# Altium PCB Main.PcbDoc (part 2 of 2)
Units mm, origin at the board's own origin, x right, y up, seen from the top; angles counter-clockwise.
Board outline 184.78 x 184.78 mm, 2 copper layers (Top Layer, Bottom Layer); 86 components, 58 nets, 400 pads, 1067 vias.
Unrouted connection lines stored in the file: 51.
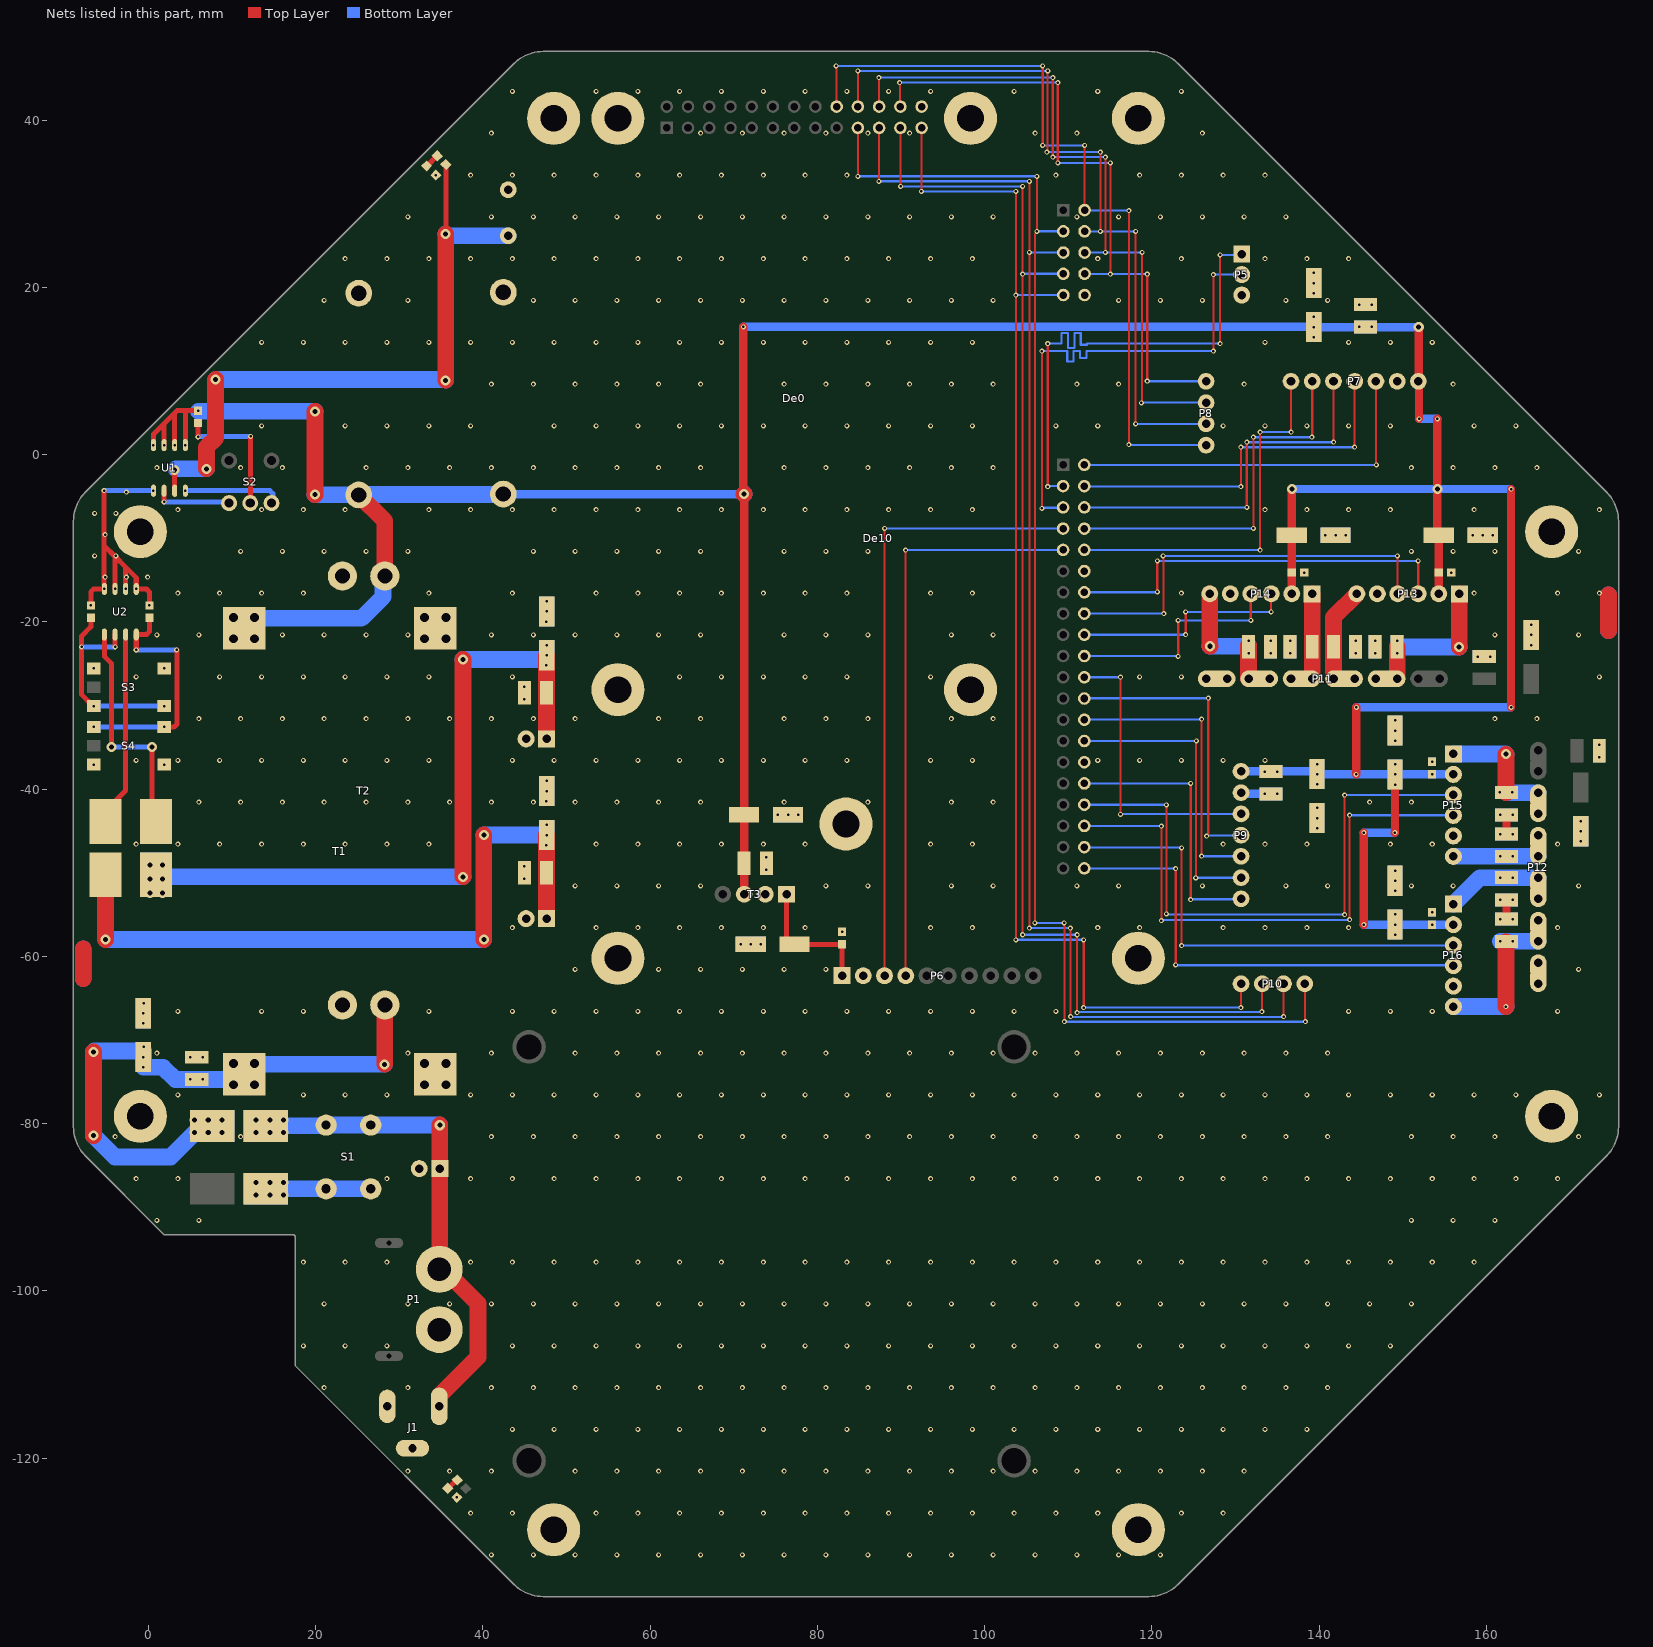
[diagram p2: the nets of this part, all layers, seen from the top]

## Via types
v1: diameter 0.6, hole 0.3, Top Layer to Bottom Layer, tented both sides, 717 vias
v2: diameter 0.6, hole 0.3, Top Layer to Bottom Layer, 287 vias
v3: diameter 1.2, hole 0.6, Top Layer to Bottom Layer, 54 vias
v4: diameter 1.83, hole 1.83, Top Layer to Bottom Layer, tented both sides, 4 vias
v5: diameter 6, hole 3, Top Layer to Bottom Layer, 4 vias
v6: diameter 1.27, hole 0.6, Top Layer to Bottom Layer, tented both sides, 1 vias

## Nets (pads, with @x,y where several pads share a name; then routed paths per layer and width w, separated by ;. In a path a pad name is that pad's centre, name@x,y a point inside that pad or via, vN(x,y) a via of type N, cw(c..) or ccw(c..) an arc to the next point about the centre after c; other vN are vias at no path point) (continued)
A_GND: C1.2 C2.2 C3.1 C4.1 C5.2 C6.2 C7.2 C8.2 C9.1 C10.1 C11.2 C12.1 C13.2 C14.2 C15.1 C16.1 C17.1 C18.1 C19.2 C20.2 C21.2 C22.2 C23.1 C24.1 C25.2 C26.1 C27.2 C28.1 C29.2 C30.2 C31.1 C32.1 C33.2 C34.1 C35.2 C36.1 D1.2 D2.2 De0.0 De0.26 De10.0 De10.10 De10.22 De10.40 J1.2 J1.3 MH1.1 MH2.1 MH3.1 MH4.1 MH5.1 MH6.1 MH7.1 MH8.1 MH9.1 P1.2 P2.2 P3.2 P4.2 P5.3 P6.2 P7.2 P9.2 P11.11 P11.12 P12.11 P12.12 P13.5 P14.5 P15.5 P16.5 pad.1@134.195,-23 pad.1@134.235,-40.575 pad.1@136.515,-23 pad.1@144.355,-23 pad.1@146.675,-23 pad.1@159.715,-24.16 pad.1@162.397,-43.083 pad.1@162.397,-45.403 pad.1@162.397,-53.243 pad.1@162.397,-55.563 pad.1@173.485,-35.425 pad.2@47.6,-18.75 pad.2@47.6,-40.25 pad.2@72.015,-58.575 pad.2@76.475,-43.05 pad.2@139.335,20.5 pad.2@139.735,-43.475 pad.2@141.965,-9.665 pad.2@145.535,17.925 pad.2@149.062,-33.003 pad.2@149.062,-50.968 pad.2@153.507,-36.753 pad.2@153.507,-54.718 pad.2@159.549,-9.665 pad.2@165.335,-21.575 pad.2@171.287,-45.048 pad.2@-0.603,-66.809 R4.1 S3.2 S4.1 T1.2 T1.4 T2.2 T2.4 T3.2 | length 24.8
  Top Layer w1: C36.1@162.397,-55.563 C35.2@162.397,-53.243 ; C34.1@162.397,-45.403 C33.2@162.397,-43.083
  Top Layer w2: -7.79,-62.7 -7.79,-59.1 ; 174.585,-21.05 174.585,-16.8
  Bottom Layer w1: P9.2@130.647,-40.433 130.789,-40.575 v2(133.485,-40.575) v2(134.985,-40.575) ; pad.2@139.335,20.525 pad.2@139.37,20.49
  Bottom Layer w2: -7.79,-62.7 -7.79,-59.1 ; 174.585,-21.05 174.585,-16.8
  other v1: 41.015,-131.575 46.015,-131.575 51.015,-131.575 56.015,-131.575 61.015,-131.575 66.015,-131.575 71.015,-131.575 76.015,-131.575 81.015,-131.575 86.015,-131.575 91.015,-131.575 96.015,-131.575 101.015,-131.575 106.015,-131.575 111.015,-131.575 116.015,-131.575 121.015,-131.575 38.515,-126.575 43.515,-126.575 53.515,-126.575 58.515,-126.575 63.515,-126.575 68.515,-126.575 73.515,-126.575 78.515,-126.575 83.515,-126.575 88.515,-126.575 93.515,-126.575 98.515,-126.575 103.515,-126.575 108.515,-126.575 113.515,-126.575 123.515,-126.575 128.515,-126.575 31.015,-121.575 36.015,-121.575 41.015,-121.575 51.015,-121.575 56.015,-121.575 61.015,-121.575 66.015,-121.575 71.015,-121.575 76.015,-121.575 81.015,-121.575 86.015,-121.575 91.015,-121.575 96.015,-121.575 101.015,-121.575 106.015,-121.575 111.015,-121.575 116.015,-121.575 121.015,-121.575 126.015,-121.575 131.015,-121.575 43.515,-116.575 48.515,-116.575 53.515,-116.575 58.515,-116.575 63.515,-116.575 68.515,-116.575 73.515,-116.575 78.515,-116.575 83.515,-116.575 88.515,-116.575 93.515,-116.575 98.515,-116.575 103.515,-116.575 108.515,-116.575 113.515,-116.575 118.515,-116.575 123.515,-116.575 128.515,-116.575 133.515,-116.575 138.515,-116.575 21.015,-111.575 31.015,-111.575 41.015,-111.575 46.015,-111.575 51.015,-111.575 56.015,-111.575 61.015,-111.575 66.015,-111.575 71.015,-111.575 76.015,-111.575 81.015,-111.575 86.015,-111.575 91.015,-111.575 96.015,-111.575 101.015,-111.575 106.015,-111.575 111.015,-111.575 116.015,-111.575 121.015,-111.575 126.015,-111.575 131.015,-111.575 136.015,-111.575 141.015,-111.575 18.515,-106.575 23.515,-106.575 28.515,-106.575 43.515,-106.575 48.515,-106.575 53.515,-106.575 58.515,-106.575 63.515,-106.575 68.515,-106.575 73.515,-106.575 78.515,-106.575 83.515,-106.575 88.515,-106.575 93.515,-106.575 98.515,-106.575 103.515,-106.575 108.515,-106.575 113.515,-106.575 118.515,-106.575 123.515,-106.575 128.515,-106.575 133.515,-106.575 138.515,-106.575 143.515,-106.575 148.515,-106.575 21.015,-101.575 31.015,-101.575 36.015,-101.575 41.015,-101.575 46.015,-101.575 51.015,-101.575 56.015,-101.575 61.015,-101.575 66.015,-101.575 71.015,-101.575 76.015,-101.575 81.015,-101.575 86.015,-101.575 91.015,-101.575 96.015,-101.575 101.015,-101.575 106.015,-101.575 111.015,-101.575 116.015,-101.575 121.015,-101.575 126.015,-101.575 131.015,-101.575 136.015,-101.575 141.015,-101.575 146.015,-101.575 151.015,-101.575 18.515,-96.575 23.515,-96.575 28.515,-96.575 38.515,-96.575 43.515,-96.575 48.515,-96.575 53.515,-96.575 58.515,-96.575 63.515,-96.575 68.515,-96.575 73.515,-96.575 78.515,-96.575 83.515,-96.575 88.515,-96.575 93.515,-96.575 98.515,-96.575 103.515,-96.575 108.515,-96.575 113.515,-96.575 118.515,-96.575 123.515,-96.575 128.515,-96.575 133.515,-96.575 138.515,-96.575 143.515,-96.575 148.515,-96.575 153.515,-96.575 158.515,-96.575 1.015,-91.575 6.015,-91.575 151.015,-91.575 156.015,-91.575 161.015,-91.575 -1.485,-86.575 3.515,-86.575 28.515,-86.575 38.515,-86.575 43.515,-86.575 48.515,-86.575 53.515,-86.575 58.515,-86.575 63.515,-86.575 68.515,-86.575 73.515,-86.575 78.515,-86.575 83.515,-86.575 88.515,-86.575 93.515,-86.575 98.515,-86.575 103.515,-86.575 108.515,-86.575 113.515,-86.575 118.515,-86.575 123.515,-86.575 128.515,-86.575 133.515,-86.575 138.515,-86.575 143.515,-86.575 148.515,-86.575 153.515,-86.575 158.515,-86.575 163.515,-86.575 168.515,-86.575 -3.985,-81.575 11.015,-81.575 41.015,-81.575 46.015,-81.575 51.015,-81.575 56.015,-81.575 61.015,-81.575 66.015,-81.575 71.015,-81.575 76.015,-81.575 81.015,-81.575 86.015,-81.575 91.015,-81.575 96.015,-81.575 101.015,-81.575 106.015,-81.575 111.015,-81.575 116.015,-81.575 121.015,-81.575 126.015,-81.575 131.015,-81.575 136.015,-81.575 141.015,-81.575 151.015,-81.575 156.015,-81.575 161.015,-81.575 171.015,-81.575 3.515,-76.575 18.515,-76.575 23.515,-76.575 28.515,-76.575 38.515,-76.575 43.515,-76.575 48.515,-76.575 53.515,-76.575 58.515,-76.575 63.515,-76.575 68.515,-76.575 73.515,-76.575 78.515,-76.575 83.515,-76.575 88.515,-76.575 93.515,-76.575 98.515,-76.575 103.515,-76.575 108.515,-76.575 113.515,-76.575 118.515,-76.575 123.515,-76.575 128.515,-76.575 133.515,-76.575 138.515,-76.575 143.515,-76.575 148.515,-76.575 153.515,-76.575 158.515,-76.575 163.515,-76.575 173.515,-76.575 1.015,-71.575 31.015,-71.575 41.015,-71.575 51.015,-71.575 56.015,-71.575 61.015,-71.575 66.015,-71.575 71.015,-71.575 76.015,-71.575 81.015,-71.575 86.015,-71.575 91.015,-71.575 96.015,-71.575 101.015,-71.575 106.015,-71.575 111.015,-71.575 116.015,-71.575 121.015,-71.575 126.015,-71.575 131.015,-71.575 136.015,-71.575 141.015,-71.575 3.515,-66.575 13.515,-66.575 18.515,-66.575 33.515,-66.575 43.515,-66.575 48.515,-66.575 53.515,-66.575 58.515,-66.575 63.515,-66.575 68.515,-66.575 73.515,-66.575 78.515,-66.575 83.515,-66.575 88.515,-66.575 93.515,-66.575 98.515,-66.575 103.515,-66.575 108.515,-66.575 143.515,-66.575 148.515,-66.575 153.515,-66.575 168.515,-66.575 51.015,-61.575 61.015,-61.575 66.015,-61.575 71.015,-61.575 76.015,-61.575 81.015,-61.575 171.015,-61.575 43.515,-56.575 53.515,-56.575 58.515,-56.575 63.515,-56.575 68.515,-56.575 73.515,-56.575 78.515,-56.575 93.515,-56.575 98.515,-56.575 113.515,-56.575 118.515,-56.575 128.515,-56.575 133.515,-56.575 138.515,-56.575 143.515,-56.575 168.515,-56.575 51.015,-51.575 56.015,-51.575 61.015,-51.575 66.015,-51.575 81.015,-51.575 86.015,-51.575 96.015,-51.575 101.015,-51.575 111.015,-51.575 116.015,-51.575 126.015,-51.575 136.015,-51.575 141.015,-51.575 151.015,-51.575 156.015,-51.575 171.015,-51.575 -1.485,-46.575 3.515,-46.575 8.515,-46.575 13.515,-46.575 18.515,-46.575 23.515,-46.575 28.515,-46.575 33.515,-46.575 53.515,-46.575 58.515,-46.575 63.515,-46.575 68.515,-46.575 73.515,-46.575 78.515,-46.575 93.515,-46.575 98.515,-46.575 128.515,-46.575 133.515,-46.575 138.515,-46.575 148.515,-46.575 153.515,-46.575 168.515,-46.575 6.015,-41.575 11.015,-41.575 16.015,-41.575 21.015,-41.575 26.015,-41.575 31.015,-41.575 36.015,-41.575 41.015,-41.575 46.015,-41.575 51.015,-41.575 56.015,-41.575 61.015,-41.575 66.015,-41.575 76.015,-41.575 86.015,-41.575 96.015,-41.575 101.015,-41.575 146.015,-41.575 151.015,-41.575 -1.485,-36.575 3.515,-36.575 8.515,-36.575 13.515,-36.575 18.515,-36.575 23.515,-36.575 28.515,-36.575 33.515,-36.575 43.515,-36.575 48.515,-36.575 53.515,-36.575 58.515,-36.575 63.515,-36.575 68.515,-36.575 73.515,-36.575 78.515,-36.575 83.515,-36.575 93.515,-36.575 98.515,-36.575 113.515,-36.575 118.515,-36.575 123.515,-36.575 128.515,-36.575 133.515,-36.575 6.015,-31.575 11.015,-31.575 16.015,-31.575 21.015,-31.575 26.015,-31.575 31.015,-31.575 36.015,-31.575 41.015,-31.575 46.015,-31.575 51.015,-31.575 61.015,-31.575 66.015,-31.575 76.015,-31.575 81.015,-31.575 86.015,-31.575 96.015,-31.575 101.015,-31.575 161.015,-31.575 166.015,-31.575 -1.485,-26.575 8.515,-26.575 13.515,-26.575 18.515,-26.575 23.515,-26.575 28.515,-26.575 33.515,-26.575 43.515,-26.575 63.515,-26.575 68.515,-26.575 73.515,-26.575 78.515,-26.575 83.515,-26.575 93.515,-26.575 118.515,-26.575 123.515,-26.575 173.515,-26.575 1.015,-21.575 6.015,-21.575 16.015,-21.575 21.015,-21.575 26.015,-21.575 31.015,-21.575 41.015,-21.575 46.015,-21.575 51.015,-21.575 56.015,-21.575 61.015,-21.575 66.015,-21.575 76.015,-21.575 81.015,-21.575 86.015,-21.575 96.015,-21.575 101.015,-21.575 161.015,-21.575 171.015,-21.575 3.515,-16.575 8.515,-16.575 13.515,-16.575 18.515,-16.575 33.515,-16.575 43.515,-16.575 53.515,-16.575 58.515,-16.575 63.515,-16.575 68.515,-16.575 73.515,-16.575 78.515,-16.575 83.515,-16.575 93.515,-16.575 98.515,-16.575 123.515,-16.575 158.515,-16.575 168.515,-16.575 173.515,-16.575 11.015,-11.575 16.015,-11.575 21.015,-11.575 26.015,-11.575 31.015,-11.575 46.015,-11.575 51.015,-11.575 56.015,-11.575 61.015,-11.575 66.015,-11.575 76.015,-11.575 81.015,-11.575 86.015,-11.575 151.015,-11.575 156.015,-11.575 161.015,-11.575 171.015,-11.575 3.515,-6.575 13.515,-6.575 18.515,-6.575 23.515,-6.575 33.515,-6.575 38.515,-6.575 43.515,-6.575 48.515,-6.575 53.515,-6.575 58.515,-6.575 63.515,-6.575 68.515,-6.575 73.515,-6.575 78.515,-6.575 83.515,-6.575 88.515,-6.575 93.515,-6.575 98.515,-6.575 133.515,-6.575 138.515,-6.575 143.515,-6.575 148.515,-6.575 158.515,-6.575 173.515,-6.575 1.015,-1.575 11.015,-1.575 16.015,-1.575 26.015,-1.575 31.015,-1.575 36.015,-1.575 41.015,-1.575 46.015,-1.575 51.015,-1.575 56.015,-1.575 61.015,-1.575 66.015,-1.575 76.015,-1.575 81.015,-1.575 86.015,-1.575 91.015,-1.575 96.015,-1.575 101.015,-1.575 151.015,-1.575 156.015,-1.575 161.015,-1.575 166.015,-1.575 13.515,3.425 23.515,3.425 28.515,3.425 33.515,3.425 38.515,3.425 48.515,3.425 53.515,3.425 58.515,3.425 63.515,3.425 68.515,3.425 73.515,3.425 78.515,3.425 83.515,3.425 88.515,3.425 93.515,3.425 98.515,3.425 108.515,3.425 113.515,3.425 128.515,3.425 133.515,3.425 138.515,3.425 143.515,3.425 148.515,3.425 158.515,3.425 163.515,3.425 41.015,8.425 46.015,8.425 51.015,8.425 56.015,8.425 61.015,8.425 66.015,8.425 76.015,8.425 81.015,8.425 86.015,8.425 91.015,8.425 96.015,8.425 101.015,8.425 111.015,8.425 116.015,8.425 131.015,8.425 156.015,8.425 13.515,13.425 18.515,13.425 23.515,13.425 28.515,13.425 33.515,13.425 38.515,13.425 43.515,13.425 48.515,13.425 53.515,13.425 58.515,13.425 63.515,13.425 68.515,13.425 73.515,13.425 78.515,13.425 83.515,13.425 88.515,13.425 93.515,13.425 98.515,13.425 133.515,13.425 143.515,13.425 148.515,13.425 153.515,13.425 21.015,18.425 31.015,18.425 46.015,18.425 51.015,18.425 56.015,18.425 61.015,18.425 66.015,18.425 71.015,18.425 76.015,18.425 81.015,18.425 86.015,18.425 91.015,18.425 96.015,18.425 101.015,18.425 116.015,18.425 121.015,18.425 126.015,18.425 136.015,18.425 141.015,18.425 23.515,23.425 28.515,23.425 33.515,23.425 38.515,23.425 43.515,23.425 48.515,23.425 53.515,23.425 58.515,23.425 63.515,23.425 68.515,23.425 73.515,23.425 78.515,23.425 83.515,23.425 88.515,23.425 93.515,23.425 98.515,23.425 113.515,23.425 123.515,23.425 133.515,23.425 138.515,23.425 143.515,23.425 31.015,28.425 41.015,28.425 46.015,28.425 51.015,28.425 56.015,28.425 61.015,28.425 66.015,28.425 71.015,28.425 76.015,28.425 81.015,28.425 86.015,28.425 91.015,28.425 96.015,28.425 101.015,28.425 111.015,28.425 116.015,28.425 121.015,28.425 126.015,28.425 131.015,28.425 136.015,28.425 38.515,33.425 43.515,33.425 48.515,33.425 53.515,33.425 58.515,33.425 63.515,33.425 68.515,33.425 73.515,33.425 78.515,33.425 83.515,33.425 108.515,33.425 118.515,33.425 123.515,33.425 128.515,33.425 133.515,33.425 41.015,38.425 66.015,38.425 71.015,38.425 76.015,38.425 81.015,38.425 86.015,38.425 91.015,38.425 106.015,38.425 111.015,38.425 126.015,38.425 43.515,43.425 53.515,43.425 58.515,43.425 63.515,43.425 68.515,43.425 73.515,43.425 78.515,43.425 83.515,43.425 88.515,43.425 93.515,43.425 103.515,43.425 113.515,43.425 123.515,43.425
  other v2: 36.88,-124.711 5.015,-72.075 6.515,-72.075 -0.603,-68.025 -0.603,-66.809 -0.587,-65.594 70.799,-58.559 72.015,-58.575 73.23,-58.575 82.935,-57.075 161.647,-55.563 163.147,-55.563 153.507,-54.718 161.647,-53.243 163.147,-53.243 149.062,-52.183 149.062,-50.968 44.95,-50.75 149.078,-49.752 73.875,-49.642 44.95,-49.25 73.875,-48.142 171.287,-46.263 161.647,-45.403 163.147,-45.403 171.287,-45.048 139.735,-44.69 171.303,-43.832 139.735,-43.475 77.69,-43.066 161.647,-43.083 163.147,-43.083 75.26,-43.05 76.475,-43.05 139.751,-42.26 47.584,-41.466 47.6,-40.25 47.6,-39.035 -6.535,-37.075 1.865,-37.075 153.507,-36.753 173.485,-36.175 173.485,-34.675 149.062,-34.218 149.062,-33.003 149.078,-31.787 44.95,-29.25 44.95,-27.75 -6.535,-25.575 1.865,-25.575 158.965,-24.16 160.465,-24.16 134.195,-23.75 136.515,-23.75 144.355,-23.75 146.675,-23.75 165.335,-22.79 134.195,-22.25 136.515,-22.25 144.355,-22.25 146.675,-22.25 165.335,-21.575 165.351,-20.359 47.584,-19.965 47.6,-18.75 47.6,-17.534 138.215,-14.11 155.799,-14.11 141.965,-9.665 143.18,-9.665 159.549,-9.665 160.765,-9.665 140.749,-9.649 158.334,-9.649 144.785,17.925 146.285,17.925 139.319,19.285 139.335,20.5 139.335,21.715 34.356,33.42
B_12V: C1.1 C3.2 F1.2 pad.1@7.639,-80.314 pad.2@-0.603,-72.059 T1.1 T2.1 | length 69.2
  Top Layer w2: v3(-6.572,-81.457) v3(-6.572,-71.424) ; v3(28.235,-72.925) 28.235,-65.855 T2.1@28.265,-65.825
  Bottom Layer w2: v3(-6.572,-81.457) -4.032,-83.997 2.648,-83.997 6.331,-80.314 pad.1@7.639,-80.314 ; v3(-6.572,-71.424) -6.482,-71.334 -0.603,-71.334 v2(-0.603,-72.059) v2(-0.603,-73.275) 1.755,-73.275 3.206,-74.725 v2(6.515,-74.725) 9.515,-74.725 9.685,-74.895 9.885,-74.895 10.155,-75.165 T1.1@10.155,-75.365 ; T1.1@12.695,-72.825 12.865,-72.825 12.965,-72.925 v3(28.235,-72.925)
  other v2: 5.015,-74.725 -0.587,-70.844
  other v3: 5.493,-81.076 7.144,-81.076 8.795,-81.076 5.493,-79.552 7.144,-79.552 8.795,-79.552
D_3P3: C11.1 C12.2 P6.1 T3.3 | length 16
  Top Layer w0.6: T3.3@76.305,-52.575 76.305,-57.95 76.93,-58.575 C11.1@77.265,-58.575 C12.2@82.935,-58.575 P6.1@82.935,-62.325
D_5V: C2.1 C4.2 C5.1 C6.1 C13.1 C14.1 C15.2 C16.2 C21.1 C22.1 C23.2 C24.2 C29.1 C30.1 C31.2 C32.2 P7.1 P9.1 P13.2 P14.2 P15.2 P16.2 pad.1@134.235,-37.925 pad.1@139.735,-38.225 pad.1@149.062,-56.218 pad.2@139.335,15.25 pad.2@145.535,15.275 pad.2@149.062,-38.253 R2.2 T1.3 T2.3 T3.1 U1.5 U1.6 U1.7 U1.8 | length 456.5
  Top Layer w0.6: v2(0.595,1.125) 0.595,2.435 1.865,3.705 ; v2(1.865,1.125) 1.865,3.705 ; v2(3.135,1.125) 3.135,4.975 ; v2(4.405,1.125) 4.405,5.075 ; v2(5.935,5.225) 5.885,5.275 4.405,5.275 3.435,5.275 3.135,4.975 ; 1.865,3.705 3.135,4.975
  Top Layer w1: v3@71.135,-4.625 v2(71.135,15.275) ; T3.1@71.225,-52.575 C4.2@71.225,-48.892 C2.1@71.225,-43.05 v3@71.225,-4.735 ; P14.2@136.715,-16.65 C24.2@136.715,-14.11 C22.1@136.715,-9.665 136.735,-9.645 v3(136.735,-4.125) ; v2(144.419,-38.253) 144.435,-38.237 v2(144.435,-30.225) ; v2(145.335,-56.225) v2(145.335,-45.225) ; v2(149.035,-45.225) 149.062,-45.198 v2(149.062,-38.253) v2(149.062,-39.468) ; P7.1@151.865,8.75 151.9,8.785 v3(151.9,15.24) ; v2(151.935,4.275) P7.1@151.935,8.68 ; v2(154.135,4.275) 154.135,-9.501 C21.1@154.299,-9.665 C23.2@154.299,-14.11 P13.2@154.299,-16.65 ; v2(162.935,-30.225) v2(162.935,-4.125)
  Top Layer w2: v3(19.9,-4.8) v3@19.9,5.14 ; C5.1@25.135,-4.827 25.137,-4.827 28.265,-7.955 T2.3@28.265,-14.525 ; v3@71.225,-4.735 v3(71.235,-4.725)
  Bottom Layer w1: C6.1@42.69,-4.728 v3@71.232,-4.728 ; v2(71.135,15.275) 139.335,15.275 139.37,15.24 v3(151.9,15.24) ; P9.1@130.647,-37.893 139.403,-37.893 v2(139.735,-38.225) 139.749,-38.225 139.777,-38.253 v2(144.419,-38.253) v2(149.062,-38.253) ; v3(136.735,-4.125) v3(154.135,-4.125) v2(162.935,-4.125) ; v2(144.435,-30.225) v2(162.935,-30.225) ; v2(145.335,-56.225) pad.1@149.055,-56.225 ; v2(145.335,-45.225) v2(149.035,-45.225) ; pad.2@149.055,-38.26 v2(149.062,-38.253) ; v2(149.062,-56.218) v2(153.507,-56.218) P16.2@156.047,-56.218 ; P7.1@151.835,8.78 P7.1@151.865,8.75 ; v2(151.935,4.275) v2(154.135,4.275) ; P15.2@156.047,-38.253 v2(153.507,-38.253) v2(149.062,-38.253)
  Bottom Layer w2: v2@5.985,5.175 v3(19.935,5.175) ; T1.3@12.695,-19.485 12.795,-19.585 25.455,-19.585 28.031,-17.009 28.031,-14.759 T2.3@28.265,-14.525 ; v3(19.9,-4.8) 19.905,-4.805 24.581,-4.805 24.603,-4.827 C5.1@25.135,-4.827 25.196,-4.767 42.396,-4.767 C6.1@42.435,-4.727 ; v3@71.232,-4.728 v3(71.235,-4.725)
  other v2: 149.062,-57.433 149.078,-55.002 139.735,-39.441 133.485,-37.925 134.985,-37.925 149.078,-37.037 139.751,-37.01 139.319,14.034 139.335,15.25 144.785,15.275 146.285,15.275 139.335,16.465
Drive_EN1: De10.20 P7.7 | length 44.9
  Top Layer w0.254: v2(132.935,-11.425) v2(132.935,2.675) ; P7.7@136.625,8.75 136.63,8.745 136.63,2.68 v2(136.635,2.675)
  Bottom Layer w0.254: De10.20@111.904,-11.393 132.703,-11.393 132.735,-11.425 v2(132.935,-11.425) ; v2(132.935,2.675) v2(136.635,2.675)
Drive_EN2: De10.42 P9.7 | length 32.7
  Top Layer w0.254: v2(124.635,-53.225) v2(124.635,-39.325)
  Bottom Layer w0.254: De10.42@111.904,-39.333 124.627,-39.333 v2(124.635,-39.325) ; v2(124.635,-53.225) 124.681,-53.179 130.601,-53.179 P9.7@130.647,-53.133
FPGA_Power: F4.1 U2.1 | length 27.7
  Top Layer w0.6: U2.1@-5.275,-21.525 -5.275,-24.125 -4.4,-25 v3(-4.4,-35) ; v3(0.4,-35) 0.4,-43.372 F4.1@0.915,-43.887
  Bottom Layer w0.6: v3(-4.4,-35) v3(0.4,-35)
IMU_SCL: De10.17 P6.3 | length 74.8
  Top Layer w0.254: P6.3@88.015,-62.325 88.025,-62.315 88.025,-8.835 v2(88.035,-8.825)
  Bottom Layer w0.254: v2(88.035,-8.825) 88.049,-8.839 109.35,-8.839 De10.17@109.364,-8.853
IMU_SDA: De10.19 P6.4 | length 69.8
  Top Layer w0.254: v2(90.535,-11.425) 90.545,-11.435 90.545,-62.315 P6.4@90.555,-62.325
  Bottom Layer w0.254: v2(90.535,-11.425) 90.551,-11.409 109.348,-11.409 De10.19@109.364,-11.393
MA1: C25.1 P11.3 P11.4 P13.1 pad.1@149.325,-23 | length 17.6
  Top Layer w2: P11.3@149.325,-26.81 v2(149.325,-23.75) C25.1@149.325,-23 ; v3(156.735,-23.025) 156.749,-23.011 P13.1@156.749,-16.65
  Bottom Layer w2: pad.1@149.325,-23 149.35,-23.025 v3(156.735,-23.025)
  other v2: 149.325,-22.25
MA2: C26.2 P11.5 P11.6 P13.6 | length 11.3
  Top Layer w2: P11.6@141.705,-26.81 C26.2@141.705,-23 141.705,-19.444 P13.6@144.499,-16.65
MA_DIR: De10.12 P7.3 | length 44.9
  Top Layer w0.254: P7.3@146.785,8.75 146.806,8.729 146.806,-1.212 v2(146.827,-1.233)
  Bottom Layer w0.254: De10.12@111.904,-1.233 v2(146.827,-1.233)
MA_I: De0.20 De10.4 P8.2 | length 90.2
  Top Layer w0.254: De0.20@84.836,41.604 v2(84.835,45.875) ; v2(107.435,36.175) 107.489,36.229 107.489,45.829 v2(107.535,45.875) ; v2(113.835,26.675) v2(113.835,36.175) ; v2(118.035,3.675) v2(118.035,26.675)
  Bottom Layer w0.254: v2(84.835,45.875) v2(107.535,45.875) ; v2(107.435,36.175) v2(113.835,36.175) ; De10.4@111.934,26.697 111.945,26.686 113.824,26.686 v2(113.835,26.675) v2(118.035,26.675) ; v2(118.035,3.675) 118.038,3.672 126.462,3.672 P8.2@126.465,3.67
MA_phase1: De10.24 P13.3 | length 47.6
  Top Layer w0.254: v2(120.635,-16.425) v2(120.635,-12.725) ; v2(151.835,-12.725) 151.842,-12.732 151.842,-16.643 P13.3@151.849,-16.65
  Bottom Layer w0.254: De10.24@111.904,-16.473 120.587,-16.473 v2(120.635,-16.425) ; v2(120.635,-12.725) v2(151.835,-12.725)
MA_phase2: De10.26 P13.4 | length 49
  Top Layer w0.254: v2(121.335,-12.125) 121.385,-12.175 121.385,-18.975 v2(121.435,-19.025) ; v2(149.335,-12.125) 149.367,-12.157 149.367,-16.618 P13.4@149.399,-16.65
  Bottom Layer w0.254: De10.26@111.904,-19.013 121.423,-19.013 v2(121.435,-19.025) ; v2(121.335,-12.125) v2(149.335,-12.125)
MA_PWM: De10.14 P7.4 | length 44.9
  Top Layer w0.254: v2(130.635,-3.825) v2(130.635,0.875) ; v2(144.235,0.875) 144.24,0.88 144.24,8.745 P7.4@144.245,8.75
  Bottom Layer w0.254: De10.14@111.904,-3.773 111.93,-3.799 130.609,-3.799 v2(130.635,-3.825) ; v2(130.635,0.875) v2(144.235,0.875)
MA_V: De0.18 De10.2 P8.1 | length 94.4
  Top Layer w0.254: v2(82.235,46.475) 82.265,46.445 82.265,41.635 De0.18@82.296,41.604 ; v2(106.935,36.975) v2(106.935,46.475) ; De10.2@111.934,29.238 v2(111.935,36.975) ; v2(117.235,1.175) v2(117.235,29.175)
  Bottom Layer w0.254: v2(82.235,46.475) v2(106.935,46.475) ; v2(106.935,36.975) v2(111.935,36.975) ; De10.2@111.934,29.237 111.965,29.206 117.204,29.206 v2(117.235,29.175) ; v2(117.235,1.175) 117.28,1.13 P8.1@126.465,1.13
MB1: C27.1 P11.7 P11.8 P14.1 | length 10.2
  Top Layer w2: P11.7@139.165,-26.81 P14.1@139.165,-16.65
MB2: C28.2 P11.9 P11.10 P14.6 pad.1@131.545,-23 | length 14.9
  Top Layer w2: P14.6@126.915,-16.65 126.915,-22.905 v3(126.935,-22.925) ; P11.10@131.545,-26.81 v2(131.545,-23.75) C28.2@131.545,-23 C28.2@131.545,-22.825
  Bottom Layer w2: v3(126.935,-22.925) 126.947,-22.913 pad.1@131.545,-22.913
  other v2: 131.545,-22.25
MB_DIR: De10.16 P7.5 | length 44.9
  Top Layer w0.254: v2(131.335,-6.325) v2(131.335,1.475) ; P7.5@141.705,8.75 141.72,8.735 141.72,1.49 v2(141.735,1.475)
  Bottom Layer w0.254: De10.16@111.904,-6.313 131.323,-6.313 v2(131.335,-6.325) ; v2(131.335,1.475) v2(141.735,1.475)
MB_I: De0.24 De10.8 P8.4 | length 78.4
  Top Layer w0.254: v2(89.835,44.475) 89.875,44.435 89.875,41.645 De0.24@89.916,41.604 ; v2(108.735,34.875) v2(108.735,44.475) ; v2(115.035,21.575) v2(115.035,34.875) ; v2(119.435,8.775) v2(119.435,21.575)
  Bottom Layer w0.254: v2(89.835,44.475) v2(108.735,44.475) ; v2(108.735,34.875) v2(115.035,34.875) ; De10.8@111.934,21.617 111.955,21.596 115.014,21.596 v2(115.035,21.575) v2(119.435,21.575) ; v2(119.435,8.775) 119.448,8.762 126.452,8.762 P8.4@126.465,8.75
MB_phase1: De10.28 P14.3 | length 27.2
  Top Layer w0.254: v2(124.035,-21.525) v2(124.035,-18.825) ; v2(134.235,-18.825) 134.25,-18.81 134.25,-16.665 P14.3@134.265,-16.65
  Bottom Layer w0.254: De10.28@111.904,-21.553 124.007,-21.553 v2(124.035,-21.525) ; v2(124.035,-18.825) v2(134.235,-18.825)
MB_phase2: De10.30 P14.4 | length 27.4
  Top Layer w0.254: v2(123.135,-24.125) v2(123.135,-19.825) ; P14.4@131.815,-16.65 131.815,-19.805 v2(131.835,-19.825)
  Bottom Layer w0.254: De10.30@111.904,-24.093 111.92,-24.109 123.119,-24.109 v2(123.135,-24.125) ; v2(123.135,-19.825) v2(131.835,-19.825)
MB_PWM: De10.18 P7.6 | length 44.8
  Top Layer w0.254: v2(132.135,-8.825) v2(132.135,2.075) ; v2(139.135,2.075) 139.165,2.105 P7.6@139.165,8.75
  Bottom Layer w0.254: De10.18@111.904,-8.853 111.918,-8.839 132.121,-8.839 v2(132.135,-8.825) ; v2(132.135,2.075) v2(139.135,2.075)
MB_V: De0.22 De10.6 P8.3 | length 84.2
  Top Layer w0.254: v2(87.335,45.075) 87.355,45.055 87.355,41.625 De0.22@87.376,41.604 ; v2(108.135,35.575) v2(108.135,45.075) ; v2(114.435,24.175) v2(114.435,35.575) ; v2(118.735,6.175) 118.785,6.225 118.785,24.125 v2(118.835,24.175)
  Bottom Layer w0.254: v2(87.335,45.075) v2(108.135,45.075) ; v2(108.135,35.575) v2(114.435,35.575) ; De10.6@111.934,24.157 111.943,24.166 114.426,24.166 v2(114.435,24.175) v2(118.835,24.175) ; v2(118.735,6.175) 118.77,6.21 P8.3@126.465,6.21
MC1: C33.1 P12.3 P12.4 P15.1 pad.1@162.397,-40.433 | length 14.7
  Top Layer w2: v3(162.335,-35.825) 162.335,-40.371 C33.1@162.397,-40.433
  Bottom Layer w2: P15.1@156.047,-35.803 162.313,-35.803 v3(162.335,-35.825) ; pad.1@162.397,-40.433 P12.3@166.207,-40.433
  other v2: 161.585,-40.371 163.085,-40.371
MC2: C34.2 P12.5 P12.6 P15.6 pad.1@162.397,-48.053 | length 10.2
  Bottom Layer w2: P15.6@156.047,-48.053 P12.6@166.207,-48.053
  other v2: 161.647,-48.053 163.147,-48.053
MC_DIR: De10.32 P9.3 | length 35.2
  Top Layer w0.254: v2(116.235,-43.025) v2(116.235,-26.625)
  Bottom Layer w0.254: De10.32@111.904,-26.633 116.227,-26.633 v2(116.235,-26.625) ; v2(116.235,-43.025) 116.261,-42.999 130.621,-42.999 P9.3@130.647,-42.973
MC_I: De0.21 De10.5 P10.2 | length 162.7
  Top Layer w0.254: v2(87.335,32.675) 87.355,32.695 87.355,39.044 De0.21@87.376,39.064 ; v2(105.335,-56.625) 105.335,-55.825 v2(105.335,24.175) v2(105.335,32.675) ; v2(110.235,-56.625) 110.274,-56.664 v2(110.274,-67.206) ; P10.2@135.727,-63.293 135.731,-63.297 135.731,-67.221 v2(135.735,-67.225)
  Bottom Layer w0.254: v2(87.335,32.675) v2(105.335,32.675) ; v2(105.335,-56.625) v2(110.235,-56.625) ; v2(105.335,24.175) 105.344,24.166 109.385,24.166 De10.5@109.394,24.157 ; v2(110.274,-67.206) 110.368,-67.206 110.441,-67.279 135.681,-67.279 v2(135.735,-67.225)
MC_phase1: De10.44 P15.3 | length 71.5
  Top Layer w0.254: v2(121.709,-41.899) 121.735,-41.925 v2(121.735,-54.925) ; v2(143.023,-55.006) 143.035,-54.995 v2(143.035,-40.725)
  Bottom Layer w0.254: De10.44@111.904,-41.873 121.683,-41.873 v2(121.709,-41.899) ; v2(121.735,-54.925) 121.816,-55.006 v2(143.023,-55.006) ; v2(143.035,-40.725) 143.057,-40.703 P15.3@156.047,-40.703
MC_phase2: De10.46 P15.4 | length 68
  Top Layer w0.254: v2(121.135,-55.725) v2(121.135,-44.425) ; v2(143.635,-55.625) v2(143.635,-43.125)
  Bottom Layer w0.254: De10.46@111.904,-44.413 121.123,-44.413 v2(121.135,-44.425) ; v2(121.135,-55.725) 121.185,-55.675 143.585,-55.675 v2(143.635,-55.625) ; v2(143.635,-43.125) 143.649,-43.139 156.033,-43.139 P15.4@156.047,-43.153
MC_PWM: De10.34 P9.4 | length 35.6
  Top Layer w0.254: v2(126.535,-45.625) 126.535,-45.531 126.735,-45.331 v2(126.735,-29.125)
  Bottom Layer w0.254: De10.34@111.904,-29.173 111.928,-29.149 126.711,-29.149 v2(126.735,-29.125) ; v2(126.535,-45.625) 126.591,-45.569 130.591,-45.569 P9.4@130.647,-45.513
MC_V: De0.19 De10.3 P10.1 | length 168.4
  Top Layer w0.254: v2(84.835,33.275) De0.19@84.836,39.064 ; v2(106,-56) 106,26.346 106.235,26.581 v2(106.235,33.275) ; v2(109.5,-56) 109.518,-56.018 109.518,-67.807 v2(109.535,-67.825) ; P10.1@138.267,-63.293 138.301,-63.327 138.301,-67.791 v2(138.335,-67.825)
  Bottom Layer w0.254: v2(84.835,33.275) v2(106.235,33.275) ; v2(106,-56) v2(109.5,-56) ; v2(106.235,26.675) 106.257,26.697 De10.3@109.394,26.697 ; v2(109.535,-67.825) v2(138.335,-67.825)
MD1: C35.1 P12.7 P12.8 P16.1 pad.1@162.397,-50.593 | length 11.5
  Bottom Layer w2: P16.1@156.047,-53.768 159.222,-50.593 P12.7@166.207,-50.593
  other v2: 161.647,-50.593 163.147,-50.593
MD2: C36.2 P12.9 P12.10 P16.6 pad.1@162.397,-58.213 | length 18.6
  Top Layer w2: v2(162.328,-66.018) C36.2@162.328,-58.282
  Bottom Layer w2: P16.6@156.047,-66.018 v2(162.328,-66.018) ; v2(161.647,-58.213) v2(163.147,-58.213) P12.10@166.207,-58.213
MD_DIR: De10.36 P9.5 | length 35.2
  Top Layer w0.254: v2(125.935,-48.025) v2(125.935,-31.625)
  Bottom Layer w0.254: De10.36@111.904,-31.713 111.948,-31.669 125.891,-31.669 v2(125.935,-31.625) ; v2(125.935,-48.025) 125.949,-48.039 130.633,-48.039 P9.5@130.647,-48.053
MD_I: De0.25 De10.9 P10.4 | length 151.9
  Top Layer w0.254: v2(92.435,31.475) 92.456,31.496 De0.25@92.456,39.064 ; v2(103.735,-58.025) 103.735,-55.825 v2(103.735,19.075) v2(103.735,31.475) ; v2(111.835,-66.125) v2(111.835,-58.025) ; v2(130.635,-66.125) 130.647,-66.113 P10.4@130.647,-63.293
  Bottom Layer w0.254: v2(92.435,31.475) v2(103.735,31.475) ; v2(103.735,-58.025) v2(111.835,-58.025) ; v2(103.735,19.075) v2(103.735,19.075) 109.393,19.076 De10.9@109.394,19.077 ; v2(111.835,-66.125) v2(130.635,-66.125)
MD_phase1: De10.48 P16.3 | length 55.9
  Top Layer w0.254: v2(123.535,-58.725) v2(123.535,-47.025)
  Bottom Layer w0.254: De10.48@111.904,-46.953 111.94,-46.989 123.499,-46.989 v2(123.535,-47.025) ; v2(123.535,-58.725) 123.564,-58.696 156.019,-58.696 P16.3@156.047,-58.668
MD_phase2: De10.50 P16.4 | length 55.7
  Top Layer w0.254: v2(122.835,-61.025) v2(122.835,-49.525)
  Bottom Layer w0.254: De10.50@111.904,-49.493 111.92,-49.509 122.819,-49.509 v2(122.835,-49.525) ; v2(122.835,-61.025) 122.881,-61.071 156.001,-61.071 P16.4@156.047,-61.118
MD_PWM: De10.38 P9.6 | length 35.2
  Top Layer w0.254: v2(125.235,-50.625) 125.281,-50.579 125.281,-47.796 125.281,-34.279 v2(125.307,-34.253)
  Bottom Layer w0.254: De10.38@111.904,-34.253 v2(125.307,-34.253) ; v2(125.235,-50.625) 125.251,-50.609 130.631,-50.609 P9.6@130.647,-50.593
MD_V: De0.23 De10.7 P10.3 | length 157.3
  Top Layer w0.254: De0.23@89.916,39.064 89.925,39.055 89.925,32.085 v2(89.935,32.075) ; v2(104.535,-57.425) 104.535,-55.825 v2(104.535,21.575) v2(104.535,32.075) ; v2(111.035,-66.725) v2(111.035,-57.425) ; v2(133.135,-66.625) 133.161,-66.599 133.161,-63.319 P10.3@133.187,-63.293
  Bottom Layer w0.254: v2(89.935,32.075) v2(104.535,32.075) ; v2(104.535,-57.425) v2(111.035,-57.425) ; v2(104.535,21.575) 104.577,21.617 De10.7@109.394,21.617 ; v2(111.035,-66.725) 111.081,-66.679 133.081,-66.679 v2(133.135,-66.625)
NetC7_1: C7.1 C9.2 F4.2 P4.1 pad.1@0.915,-50.263 pad.2@47.6,-24 | length 83.4
  Top Layer w2: v3(37.6,-50.5) v3(37.6,-24.5) ; P4.1@47.6,-34 C9.2@47.6,-28.5 v2(47.6,-24)
  Bottom Layer w2: pad.1@1.1,-50.077 pad.1@0.915,-50.263 1.152,-50.5 1.419,-50.5 v3(1.677,-50.758) ; pad.1@1.677,-50.5 v3(37.6,-50.5) ; v3(37.6,-24.5) 47.1,-24.5 v2(47.6,-24)
  other v2: 47.584,-25.215 47.6,-22.785
  other v3: 0.153,-52.409 1.677,-52.409 0.153,-50.758 0.153,-49.107 1.677,-49.107
NetC8_1: C8.1 C10.2 F3.2 P3.1 pad.2@47.6,-45.5 | length 83
  Top Layer w2: F3.2@-5.135,-50.263 -5.135,-57.965 v3(-5.117,-57.983) ; v3(40.1,-58) v3(40.1,-45.5) ; P3.1@47.6,-55.5 C10.2@47.6,-50 v2(47.6,-45.5)
  Bottom Layer w2: v3(-5.117,-57.983) -5.1,-58 v3(40.1,-58) ; v3(40.1,-45.5) v2(47.6,-45.5)
  other v2: 47.584,-46.715 47.6,-44.285
NetD1_1: D1.1 R1.1 | length 1.5
  Top Layer w0.6: D1.1@35.784,-123.615 35.855,-123.615 36.845,-122.625 R1.1@36.915,-122.625
NetD2_1: D2.1 R3.1 | length 1.8
  Top Layer w0.6: D2.1@33.26,34.516 33.295,34.516 34.497,35.718 R3.1@34.533,35.718
NetF1_1: F1.1 J1.1 P1.1 P2.1 pad.1@14.015,-80.314 S1.1 | length 58.6
  Top Layer w2: J1.1@34.765,-113.825 34.765,-112.575 39.402,-107.938 39.402,-101.523 35.318,-97.439 P1.1@34.767,-97.439 34.83,-97.376 v6(34.83,-80.187)
  Bottom Layer w2: pad.1@14.078,-80.251 21.178,-80.251 S1.1@21.241,-80.187 v6(34.83,-80.187)
  other v3: 12.859,-81.076 14.51,-81.076 16.161,-81.076 12.859,-79.552 14.51,-79.552 16.161,-79.552
NetF2_1: F2.1 pad.1@14.015,-87.807 S1.2 | length 12.6
  Bottom Layer w2: pad.1@14.015,-87.807 S1.2@21.241,-87.807 S1.2@26.575,-87.807
  other v3: 12.859,-88.569 14.51,-88.569 16.161,-88.569 12.859,-87.045 14.51,-87.045 16.161,-87.045
NetR2_1: R2.1 S2.2 | length 15.9
  Top Layer w0.6: v2(5.935,2.125) R2.1@5.935,3.775 ; S2.2@12.175,-5.805 12.205,-5.775 12.205,2.145 v2(12.22,2.16)
  Bottom Layer w0.6: v2(5.935,2.125) 5.97,2.16 v2(12.22,2.16)
NetR3_2: R3.2 R4.2 U1.3 | length 78.4
  Top Layer w0.6: U1.3@3.135,-4.325 v3(3.135,-1.825) ; v3@35.558,26.398 35.558,34.41 35.576,34.428 35.558,34.445 R3.2@35.558,34.693
  Top Layer w2: v3(6.935,-1.714) 6.935,0.875 8.002,1.942 8.002,8.942 v3(8.035,8.975) ; v3(35.535,8.875) v3(35.535,26.375)
  Bottom Layer w0.6: v3(3.135,-1.825) v3@3.246,-1.714
  Bottom Layer w2: v3@3.246,-1.714 v3(6.935,-1.714) ; v3(8.035,8.975) 35.435,8.975 v3(35.535,8.875) ; v3(35.535,26.375) 35.735,26.175 R4.2@43.015,26.175
NetR5_1: pad.1@1.865,-30.075 pad.1@-6.535,-30.075 R5.1 S3.1 U2.2 | length 25.6
  Top Layer w0.6: R5.1@-6.9,-19.5 -6.9,-20.6 -8,-21.7 -8,-28.71 -6.635,-30.075 v2(-6.535,-30.075) ; U2.2@-4.005,-21.525 -4.005,-22.995 v2(-4,-23)
  Bottom Layer w0.6: v2(-8,-23) v2(-4,-23) ; pad.1@-6.56,-30.1 v2(-6.535,-30.075) v2(1.865,-30.075)
NetR5_2: R5.2 R6.2 U1.1 U2.5 U2.6 U2.7 U2.8 | length 37.6
  Top Layer w0.6: v2(-6.9,-18.05) -6.9,-16.426 -6.549,-16.075 v2(-5.275,-16.075) ; v2(-5.3,-4.3) -5.3,-10.9 ; U2.8@-5.275,-16.05 -5.275,-15.65 -5.3,-15.625 -5.3,-10.9 ; v2(-4.005,-16.075) v2@-4.005,-12.195 ; v2(-2.735,-16.075) -2.735,-13.465 ; v2(0.1,-18.05) 0.1,-16.426 -0.251,-16.075 v2(-1.465,-16.075) -1.465,-14.735 -2.735,-13.465 ; -5.3,-10.9 v2@-4.005,-12.195 ; v2@-4.005,-12.195 -2.735,-13.465
  Bottom Layer w0.6: v2(-5.3,-4.3) -5.275,-4.325 v2(0.595,-4.325)
  other v2: -5.175,-14.655 -2.635,-14.655 -0.095,-14.655 -6.445,-12.115 -3.905,-12.115 -5.175,-9.575 -6.445,-7.035 -3.905,-7.035 -2.635,-4.495
NetR6_1: pad.1@1.865,-32.575 pad.1@-6.535,-32.575 R6.1 S4.2 U2.4 | length 29.1
  Top Layer w0.6: v2(-1.465,-23.365) U2.4@-1.465,-21.525 -0.251,-21.525 0.1,-21.174 R6.1@0.1,-19.5 ; S4.2@1.965,-32.575 v2(1.865,-32.575) 1.89,-32.6 3.049,-32.6 3.4,-32.249 3.4,-23.4 v2(3.365,-23.365)
  Bottom Layer w0.6: v2(-6.535,-32.575) v2(1.865,-32.575) ; v2(-1.465,-23.365) v2(3.365,-23.365)
NetS2_1: S2.1 U1.4 | length 11.8
  Bottom Layer w0.6: v2(4.405,-4.325) 14.515,-4.325 14.866,-4.676 14.866,-5.654 S2.1@14.715,-5.805
NetS2_3: S2.3 U1.2 | length 9.2
  Top Layer w0.6: v2(1.865,-5.665) U1.2@1.865,-4.325
  Bottom Layer w0.6: v2(1.865,-5.665) 9.495,-5.665 S2.3@9.635,-5.805
RPi_Power: F3.1 U2.3 | length 23.4
  Top Layer w0.6: F3.1@-5.135,-43.887 -5.135,-42.579 -2.735,-40.179 U2.3@-2.735,-21.525
UART_RX: De10.13 P5.1 | length 59.1
  Top Layer w0.254: v2(107.535,-3.825) v2(107.535,13.275) ; v2(128.135,13.275) v2(128.135,23.875)
  Bottom Layer w0.254: v2(107.535,-3.825) 107.587,-3.773 De10.13@109.364,-3.773 ; v2(107.535,13.275) 109.075,13.275 109.202,13.275 109.202,14.521 109.964,14.521 109.964,12.756 110.726,12.756 110.726,14.521 111.488,14.521 111.488,13.125 112.25,13.125 112.25,13.275 114.067,13.275 v2(128.135,13.275) ; v2(128.135,23.875) 130.635,23.875 P5.1@130.735,23.975
UART_TX: De10.15 P5.2 | length 58.8
  Top Layer w0.254: v2(106.835,-6.425) v2(106.835,12.375) ; v2(127.335,12.375) 127.335,12.275 v2(127.335,21.525)
  Bottom Layer w0.254: v2(106.835,-6.425) 106.891,-6.369 109.308,-6.369 De10.15@109.364,-6.313 ; v2(106.835,12.375) 108.98,12.375 109.107,12.375 109.107,12.387 109.869,12.387 109.869,11.105 110.631,11.105 110.631,12.375 111.393,12.375 111.393,11.545 112.155,11.545 112.155,12.375 114.818,12.375 v2(127.335,12.375) ; v2(127.335,21.525) P5.2@130.735,21.525
pads on no net: De0.1 De0.2 De0.3 De0.4 De0.5 De0.6 De0.7 De0.8 De0.9 De0.10 De0.11 De0.12 De0.13 De0.14 De0.15 De0.16 De0.17 De10.1 De10.11 De10.21 De10.23 De10.25 De10.27 De10.29 De10.31 De10.33 De10.35 De10.37 De10.39 De10.41 De10.43 De10.45 De10.47 De10.49 P1.3 P6.5 P6.6 P6.7 P6.8 P6.9 P6.10 RPi1.1 S2.4 S3.3 S4.3 T3.4
copper on no net:
  other v4: 25.15,2.793 42.45,2.893 25.15,11.683 42.45,11.783
  other v5: 7.289,-67.205 38.289,-67.205 7.289,-13.205 38.289,-13.205

## Polygon pours and split planes (outlines as drawn)
A_GND on Top Layer "A_GND_L01_P019" (solid, remove dead copper, pour order 19): -8.975,50.825 -8.975,-59.99 -8.985,-60 46,-60 46,-67 158,-67 158,-32 120,-32 120,-19 177,-19 177,51
A_GND on Top Layer "A_GND_L01_P006" (solid, remove dead copper, pour order 6): -8.865,-61.325 -8.865,-136.325 178.135,-136.325 178.135,-19.325 121.135,-19.325 121.135,-30.325 159.135,-30.325 159.135,-68.325 45.135,-68.325 45.135,-61.325
D_5V on Top Layer "D_5V_L01_P018" (solid, pour order 18): 6.685,6 2.5,6 0,3.5 0,0 5.01,0 5,4.4 6.685,4.4
NetR5_2 on Top Layer "NETR5_2_L01_P015" (solid, remove dead copper, pour order 15): 1.2,-18.875 -8.979,-18.875 -8.979,-2.8 1.2,-2.8
A_GND on Bottom Layer "A_GND_L02_P020" (solid, remove dead copper, pour order 20): -8.975,50.825 -8.975,-59.99 -8.985,-60 46,-60 46,-67 158,-67 158,-32 120,-32 120,-19 177,-19 177,51
D_5V on Bottom Layer "D_5V_L02_P011" (solid, pour order 11): 6.685,6 2.5,6 0,3.5 0,0 5.01,0 5.01,4.4 6.685,4.4
NetR5_2 on Bottom Layer "NETR5_2_L02_P014" (solid, remove dead copper, pour order 14): 1.2,-18.875 -8.979,-18.875 -8.979,-2.8 1.2,-2.8
A_GND on Bottom Layer "A_GND_L02_P007" (solid, remove dead copper, pour order 7): -8.865,-61.325 -8.865,-136.325 178.135,-136.325 178.135,-19.325 121.135,-19.325 121.135,-30.325 159.135,-30.325 159.135,-68.325 45.135,-68.325 45.135,-61.325

## Keep-outs
Keep-Out Layer:
  lines w0.013: -7.514,-83.914 cw(c-3.979,-80.378) -8.979,-80.378 -8.979,-7.983 cw(c-3.979,-7.983) -7.514,-4.448 43.676,46.743 cw(c47.212,43.207) 47.212,48.207 119.607,48.207 cw(c119.607,43.207) 123.142,46.743 174.333,-4.448 cw(c170.797,-7.983) 175.797,-7.983 175.797,-80.378 cw(c170.797,-80.378) 174.333,-83.914 123.142,-135.104 cw(c119.607,-131.569) 119.607,-136.569 47.212,-136.569 cw(c47.212,-131.569) 43.676,-135.104 17.567,-108.995 17.567,-93.614 ccw(c17.242,-93.614) 17.242,-93.289 1.867,-93.289 -7.514,-83.914 ; -7.514,-83.914 -7.514,-83.914

## Silkscreen, mask and mechanical layers (free items; w line width, h text height)
Top Overlay:
  lines w0.1: 124.495,-32.19 156.375,-32.19 156.375,13.495 ; 124.545,-32.24 124.545,13.445 156.425,13.445 ; 125.902,-33.383 171.587,-33.383 171.587,-65.263 ; 125.952,-33.333 125.952,-65.213 171.637,-65.213
  text "Warn" at 32.015,33.501 h1.5 r225
  text "off" at 14.735,16.951 h1 r225
  text "ON" at 10.235,12.551 h1 r225
  text "F" at -3.535,-23.125 h1.5 r270
  text "R" at -3.5,-38.6 h1.5 r270
  text "Power" at 37.189,-126.075 h1.5 r315

## Text inside footprints (layer, text, board x,y; h text height)
C5: Top Overlay "+" at 19.38,-8.907 h2 r90
C6: Top Overlay "+" at 36.68,-8.807 h2 r90
De0: Top Overlay "1" at 62.226,37.264 h0.64 r90; Top Overlay "26" at 94.626,41.434 h0.64 r90; Top Overlay "25" at 94.626,38.234 h0.64 r90; Top Overlay "2" at 60.326,42.234 h0.64 r90
De10: Top Overlay "40" at 112.234,-52.093 h0.64 r90; Top Overlay "39" at 109.534,-52.093 h0.64 r90; Top Overlay "2" at 112.164,30.877 h0.64 r90; Top Overlay "1" at 109.664,30.877 h0.64 r90; Top Overlay "9" at 109.664,17.077 h0.64 r90; Top Overlay "10" at 112.164,16.577 h0.64 r90; Top Overlay "2" at 112.234,0.407 h0.64 r90; Top Overlay "1" at 109.634,0.407 h0.64 r90
P1: Top Overlay "-" at 31.197,-105.184 h2 r90; Top Overlay "+" at 31.197,-98.199 h2 r90
RPi1: Top Overlay "RPi" at 72.935,-96.325 h7.62
T1: Top Overlay "Vout" at 13.665,-27.44 h1 r90; Top Overlay "GND" at 32.715,-26.805 h1 r90; Top Overlay "GND" at 32.715,-70.62 h1 r90; Top Overlay "Vin" at 13.665,-70.62 h1 r90
T2: Top Overlay "OUT" at 27.615,-26.375 h3 r90; Top Overlay "IN" at 27.365,-63.125 h3 r90; Top Overlay "-" at 20.685,-66.575 h2 r90; Top Overlay "+" at 33.518,-66.575 h2 r90; Top Overlay "-" at 20.685,-15.275 h2 r90; Top Overlay "+" at 33.518,-15.275 h2 r90